# EAGLE board PR9001 (EAGLE 6.6.0)
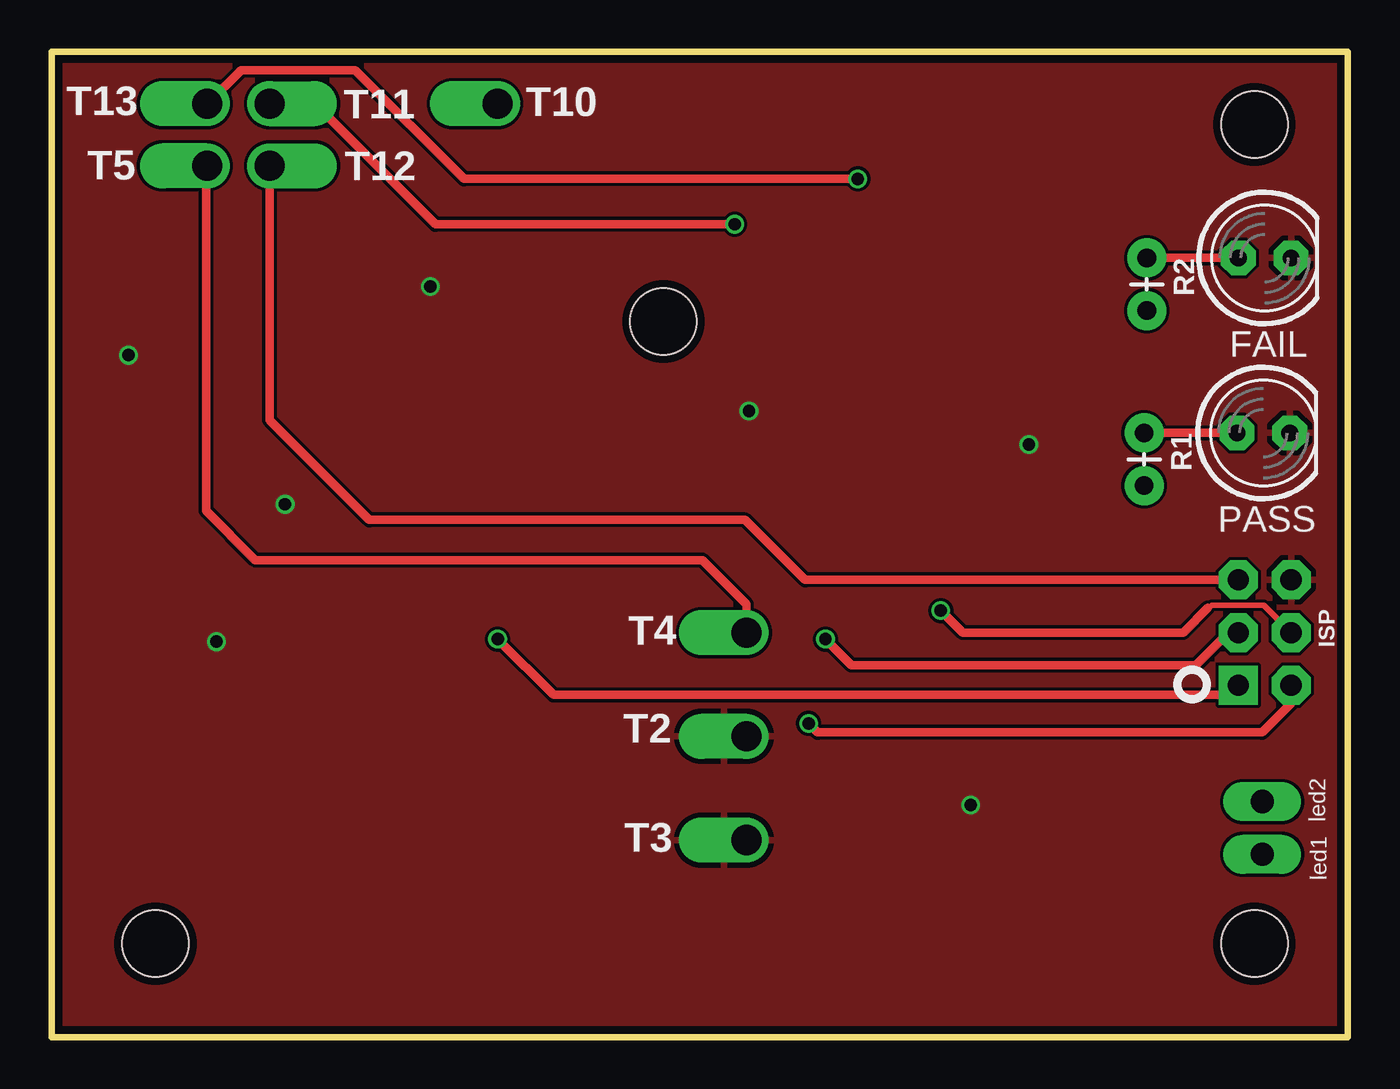
[diagram p0: board, top side]
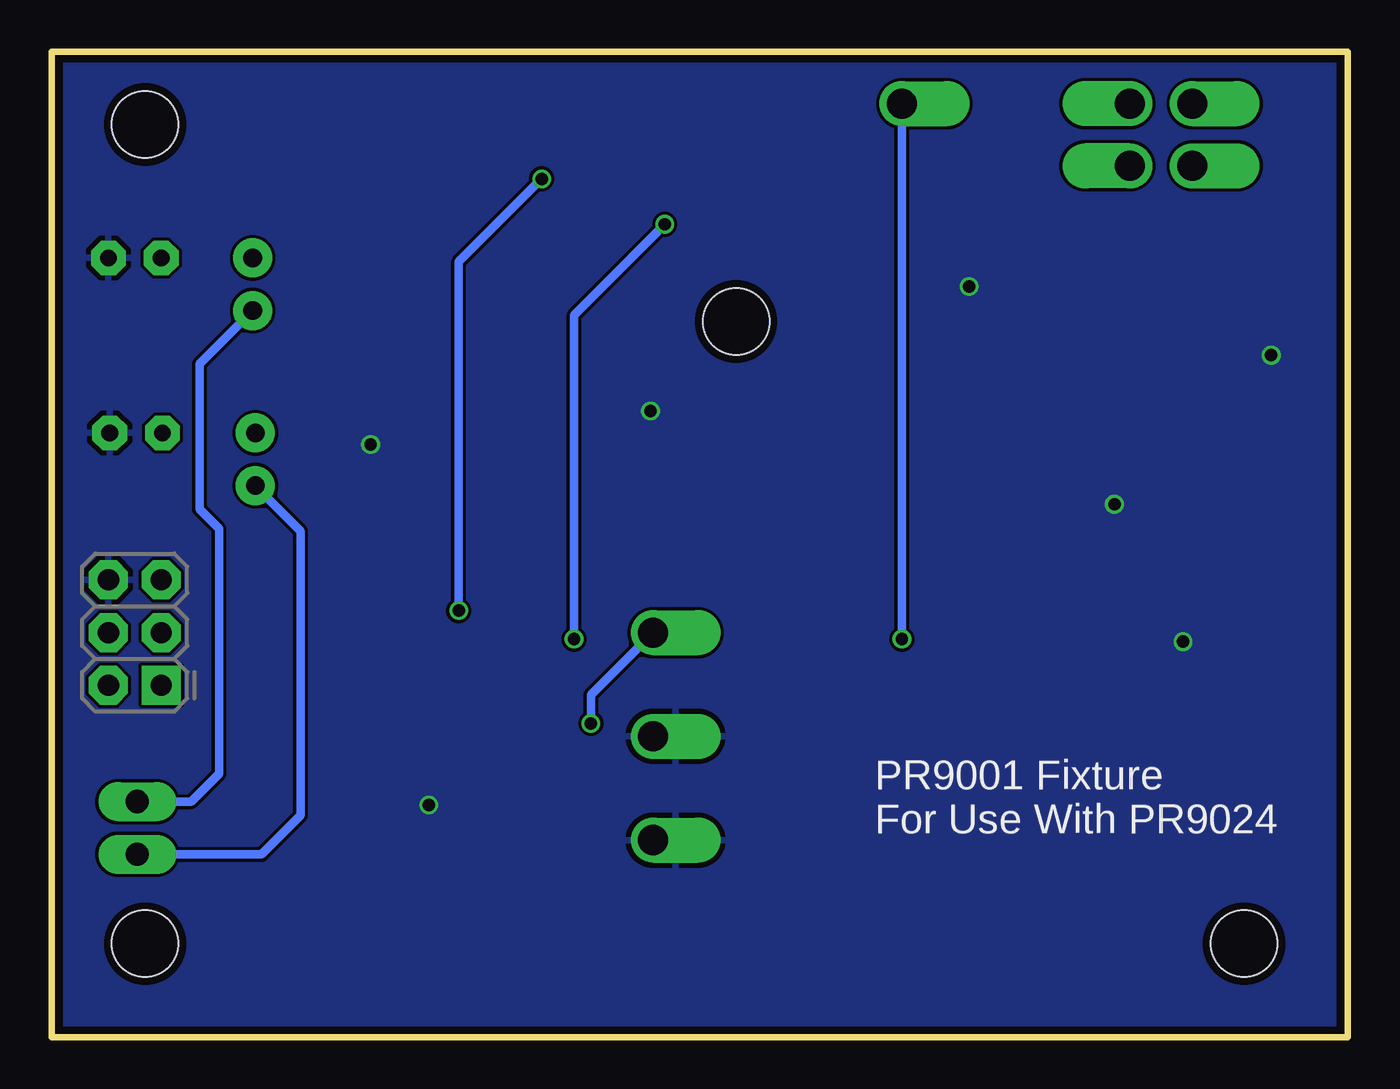
[diagram p1: board, bottom side, seen from below]

Size 62.5 x 47.5 mm. Coordinates in mm from the lower left corner, seen from the top.
Outline: 0,47.5 62.5,47.5 62.5,0 0,0 0,47.5
Copper layers (1*16): Top 0.0356mm / dielectric 1.5011mm / Bottom 0.0356mm
Design rules "LaenPCBOrder *": minimum track width 6mil, minimum drill 13mil, track to track 6mil, track to pad 6mil, pad to pad 6mil, via to via 6mil, smd to smd 6mil, copper to edge 15mil, drill to drill 6mil, minimum pad ring 7mil, minimum via ring 5mil, stop-mask expansion 3mil, vias tented up to drill 0mil, thermal gap 10mil
Net classes: 1 antenna: clearance 1.27 mm
Holes 3.2 mm at 5,4.5 58,4.5 58,44 29.5,34.5

## Footprints (pad centres in the part's own frame; a part is rotated, then mirrored left to right if it is on the bottom)
LED5MM = drill 0.813 pad 1.676 octagon: A -1.27,0; K 1.27,0
2X3-NS = drill 1.016 pad 1.88 square: 1 -2.54,-1.27 | drill 1.016 pad 1.88 octagon: 2 -2.54,1.27; 3 0,-1.27; 4 0,1.27; 5 2.54,-1.27; 6 2.54,1.27
1X02_LONGPADS = drill 1.118 pad 1.88 long: 1 0,0; 2 2.54,0
AXIAL-0.1 = drill 0.9 pad 1.88: P$1 0,0; P$2 2.54,0
PR9001_TESTPOINT = drill 1.45 offset: P$1 0,0

## Placement (x,y rotation side)
FAIL  [LED5MM]  58.5,37.56 0 top
ISP  [2X3-NS]  58.5,19.5 90 bottom
JP1  M02PTH3  [1X02_LONGPADS]  58.38,8.81 90 top
PASS  [LED5MM]  58.44,29.12 0 top
R1  [AXIAL-0.1]  52.69,29.12 270 top
R2  [AXIAL-0.1]  52.81,37.56 270 top
T2  PR9001_TESTPOINT  [PR9001_TESTPOINT]  33.5,14.5 0 bottom
T3  PR9001_TESTPOINT  [PR9001_TESTPOINT]  33.5,9.5 0 bottom
T4  PR9001_TESTPOINT  [PR9001_TESTPOINT]  33.5,19.5 0 bottom
T5  PR9001_TESTPOINT  [PR9001_TESTPOINT]  7.5,42 0 bottom
T10  PR9001_TESTPOINT  [PR9001_TESTPOINT]  21.5,45 0 bottom
T11  PR9001_TESTPOINT  [PR9001_TESTPOINT]  10.5,45 180 bottom
T12  PR9001_TESTPOINT  [PR9001_TESTPOINT]  10.5,42 180 bottom
T13  PR9001_TESTPOINT  [PR9001_TESTPOINT]  7.5,45 0 bottom

## Library data of the parts
FAIL PASS = adafruit
ISP = PR_Parts_Library; MFG_PN: M20-9980346
JP1 = SparkFun-Connectors
R1 R2 = SparkFun-Resistors
T2-T5 T10-T13 = PR_Parts_Library

## Nets
!RST: ISP.1 T10.P$1
GND: FAIL.K ISP.6 PASS.K T2.P$1 T3.P$1
N$1: JP1.2 R2.P$2
N$2: PASS.A R1.P$1
N$3: JP1.1 R1.P$2
N$4: FAIL.A R2.P$1
RESET: ISP.5 T12.P$1
SCLK: ISP.3 T11.P$1
SDIO: ISP.4 T13.P$1
VCC: ISP.2 T4.P$1 T5.P$1

## Tracks (layer width: path | path; a pad name or v marks a point on that pad's centre or on a via)
!RST  (via drill 0.6)
  Top 0.406: v21.5,19.19 24.19,16.5 56.77,16.5 ISP.1
  Bottom 0.406: v21.5,19.19 T10.P$1
GND  (via drill 0.6)
  other vias: 3.69,32.88 18.25,36.19 11.25,25.69 7.94,19.06 47.12,28.56 33.62,30.19 44.31,11.19
  pour Bottom: 0.06,47.56 63,47.81 62.88,-0.5 -0.06,-0.5
  pour Top: -0.06,47.62 62.75,47.5 62.75,-0.5 -0.06,-0.5
N$1
  Bottom 0.406: JP1.2 55.77,11.35 54.44,12.69 54.44,24.5 55.38,25.44 55.38,32.46 R2.P$2
N$2
  Top 0.406: R1.P$1 PASS.A
N$3
  Bottom 0.406: JP1.1 52.38,8.81 50.5,10.69 50.5,24.4 R1.P$2
N$4
  Top 0.406: R2.P$1 FAIL.A
N$21
  pour Bottom: 
RESET
  Top 0.406: ISP.5 36.34,22.04 33.44,24.94 15.31,24.94 10.5,29.75 T12.P$1
SCLK  (via drill 0.6)
  Top 0.406: ISP.3 56.75,19.5 55.19,17.94 38.56,17.94 v37.31,19.19 | v32.94,39.19 18.5,39.19 12.69,45 T11.P$1
  Bottom 0.406: v37.31,19.19 37.31,34.81 v32.94,39.19
SDIO  (via drill 0.6)
  Top 0.254: 55.75,20.69 55.81,20.69 55.94,20.81 58.46,20.81 ISP.4
  Top 0.406: v38.88,41.38 19.88,41.38 14.62,46.62 9.12,46.62 T13.P$1 | 55.75,20.69 54.56,19.5 43.94,19.5 v42.88,20.56
  Bottom 0.406: v38.88,41.38 42.88,37.38 v42.88,20.56
VCC  (via drill 0.6)
  Top 0.406: ISP.2 59.77,16.08 58.38,14.69 36.94,14.69 v36.5,15.12 | T4.P$1 33.5,20.88 31.38,23 9.81,23 7.44,25.38 7.44,41.94 T5.P$1
  Bottom 0.406: T5.P$1 7.38,42 | v36.5,15.12 36.5,16.5 T4.P$1

## Text on the board
tNames: led2 | led1
bNames: PR9001 Fixture / For Use With PR9024